# Altium PCB PCB1.PcbDoc (part 6 of 6)
Units mm, origin at the board's own origin, x right, y up, seen from the top; angles counter-clockwise.
Board outline 1473.2 x 504.06 mm, 4 copper layers (Top Layer, MidLayer1, MidLayer2, Bottom Layer); 162 components, 222 nets, 4894 pads, 2213 vias.
Unrouted connection lines stored in the file: 216.
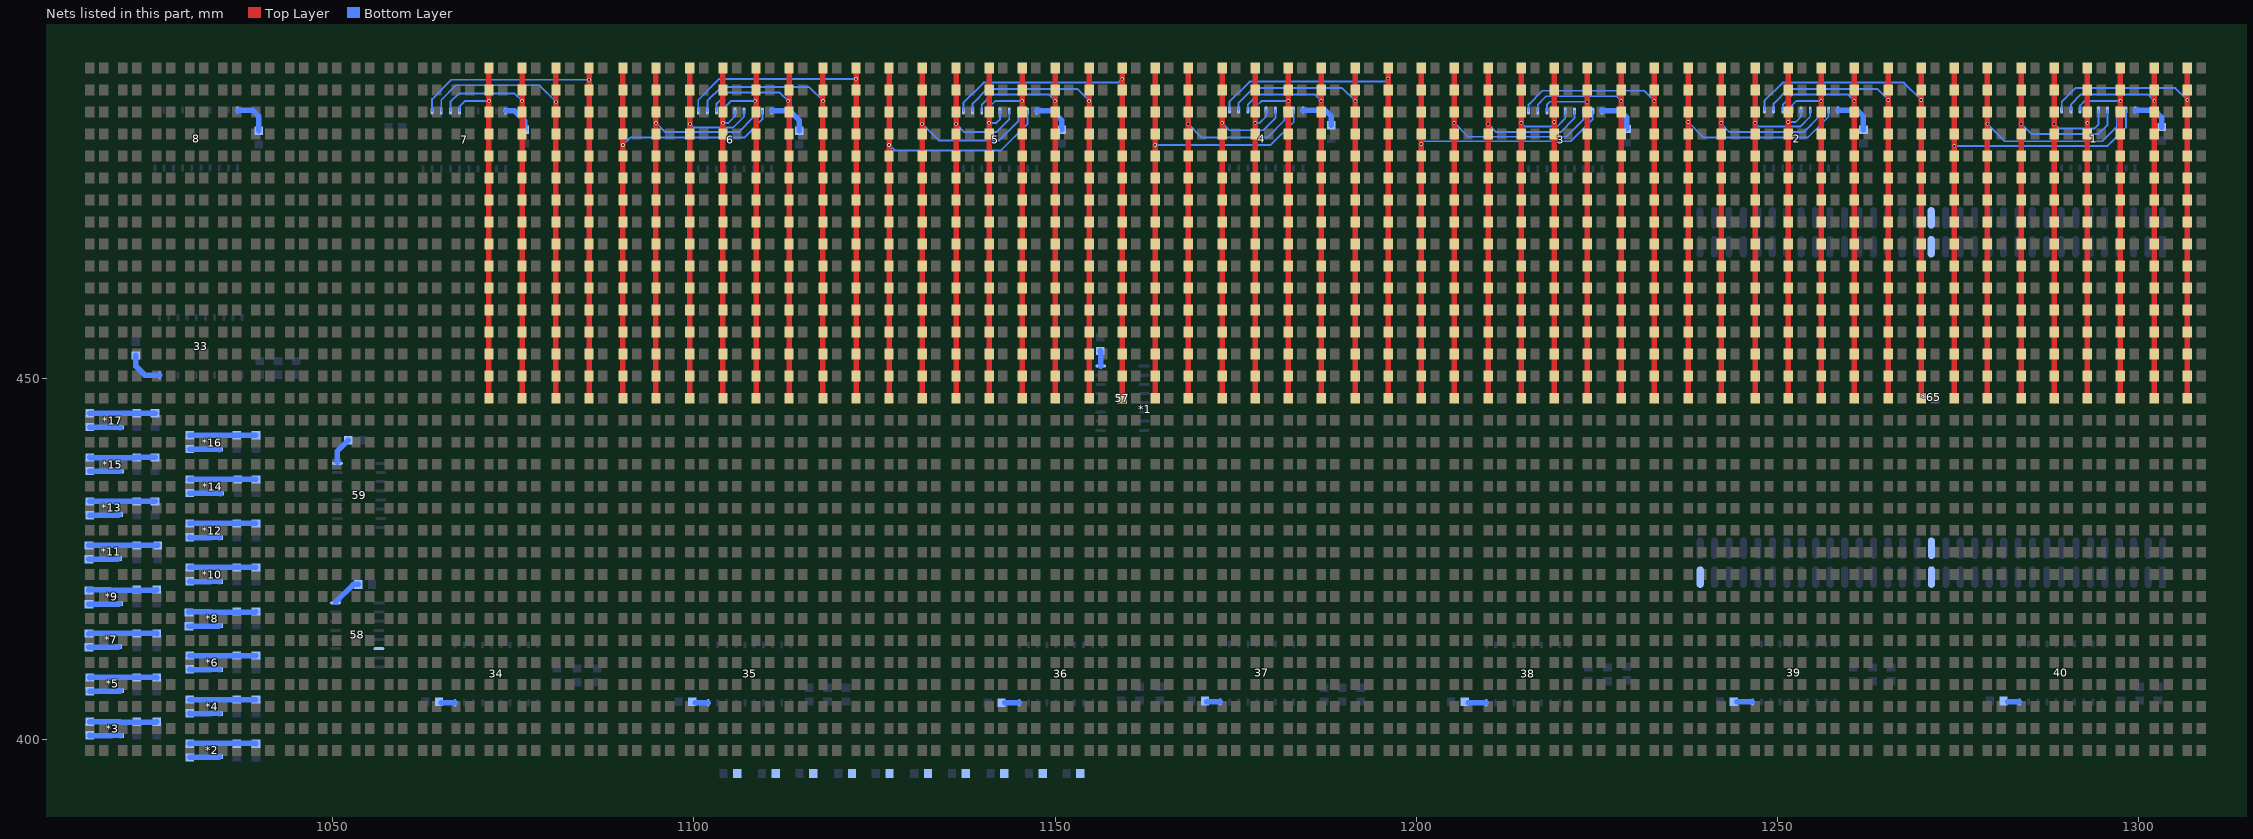
[diagram p8: the nets of this part, all layers, seen from the top]

## Via types
v1: diameter 0.508, hole 0.305, Top Layer to MidLayer1, 2032 vias
v2: diameter 0.508, hole 0.305, Top Layer to Bottom Layer, 143 vias
v3: diameter 0.508, hole 0.305, MidLayer2 to Bottom Layer, 38 vias

## Nets (pads, with @x,y where several pads share a name; then routed paths per layer and width w, separated by ;. In a path a pad name is that pad's centre, name@x,y a point inside that pad or via, vN(x,y) a via of type N, cw(c..) or ccw(c..) an arc to the next point about the centre after c; other vN are vias at no path point) (continued)
Net*1_93: 7.15 *1.93 | length 50.7
  Top Layer w0.762: *1.93@1071.626,447.167 *1.93@1071.626,486.918 *1.93@1071.626,492.887
  Bottom Layer w0.254: 7.15@1067.562,487.044 1067.562,487.68 1068.324,488.442 v2(1071.626,488.442)
Net*1_94: 7.14 *1.94 | length 57.8
  Top Layer w0.762: *1.94@1076.198,447.167 *1.94@1076.198,486.918 *1.94@1076.198,489.966 *1.94@1076.198,492.887
  Bottom Layer w0.254: 7.14@1066.292,487.044 1066.292,488.315 1067.435,489.458 1075.182,489.458 v2(1076.198,488.442)
Net*1_95: 7.13 *1.95 | length 64.9
  Top Layer w0.762: *1.95@1080.897,447.167 *1.95@1080.897,486.918 *1.95@1080.897,489.966 *1.95@1080.897,492.887
  Bottom Layer w0.254: 7.13@1065.022,487.044 1065.022,488.569 1067.054,490.601 1078.611,490.601 v2(1080.897,488.315)
Net*1_96: 7.12 *1.96 | length 70.2
  Top Layer w0.762: *1.96@1085.469,447.167 *1.96@1085.469,489.966 *1.96@1085.469,492.887
  Bottom Layer w0.254: 7.12@1063.752,487.044 1063.752,488.696 1066.419,491.363 v2(1085.469,491.363)
Net*1_97: 6.19 *1.97 | length 67.6
  Top Layer w0.762: *1.97@1090.168,447.421 1090.168,462.661 *1.97@1090.168,483.87 *1.97@1090.168,493.141
  Bottom Layer w0.254: v2(1090.168,482.346) 1091.184,483.362 1106.932,483.362 1109.472,485.902 6.19@1109.472,487.044
Net*1_98: 6.18 *1.98 | length 61.4
  Top Layer w0.762: *1.98@1094.74,447.421 1094.74,462.661 *1.98@1094.74,483.87 *1.98@1094.74,486.918 *1.98@1094.74,493.141
  Bottom Layer w0.254: v2(1094.74,485.394) 1096.01,484.124 1106.175,484.124 1108.202,486.151 6.18@1108.202,487.044
Net*1_99: 6.17 *1.99 | length 54.8
  Top Layer w0.762: *1.99@1099.439,447.421 *1.99@1099.439,486.918 *1.99@1099.439,493.141
  Bottom Layer w0.254: v2(1099.439,485.267) 1099.947,484.759 1105.408,484.759 1106.932,486.283 6.17@1106.932,487.044
Net*1_100: 6.16 *1.100 | length 48.5
  Top Layer w0.762: *1.100@1104.011,447.421 1104.011,468.757 *1.100@1104.011,486.918 *1.100@1104.011,493.141
  Bottom Layer w0.254: v2(1104.011,485.394) 1104.773,485.394 1105.662,486.283 6.16@1105.662,487.044
Net*1_101: 6.15 *1.101 | length 50.7
  Top Layer w0.762: *1.101@1108.583,447.421 *1.101@1108.583,489.966 *1.101@1108.583,493.141
  Bottom Layer w0.254: 6.15@1104.392,487.044 1104.392,487.68 1105.154,488.442 v2(1108.456,488.442)
Net*1_102: 6.14 *1.102 | length 57.7
  Top Layer w0.762: *1.102@1113.155,447.421 1113.155,474.853 *1.102@1113.155,489.966 *1.102@1113.155,493.014 *1.102@1113.155,493.141
  Bottom Layer w0.254: 6.14@1103.122,487.044 1103.122,488.061 1104.646,489.585 1111.885,489.585 v2(1113.028,488.442)
Net*1_103: 6.13 *1.103 | length 64.7
  Top Layer w0.762: *1.103@1117.854,447.421 1117.854,474.853 *1.103@1117.854,489.966 *1.103@1117.854,493.014 *1.103@1117.854,493.141
  Bottom Layer w0.254: 6.13@1101.852,487.044 1101.852,488.442 1103.757,490.347 1115.949,490.347 v2(1117.854,488.442)
Net*1_104: 6.12 *1.104 | length 70.3
  Top Layer w0.762: *1.104@1122.426,447.421 *1.104@1122.426,450.342 *1.104@1122.426,453.39 *1.104@1122.426,456.438 *1.104@1122.426,459.486 *1.104@1122.426,462.534 *1.104@1122.426,465.582 *1.104@1122.426,468.63 *1.104@1122.426,471.678 *1.104@1122.426,474.726 *1.104@1122.426,477.774 *1.104@1122.426,480.822 *1.104@1122.426,483.87 *1.104@1122.426,486.918 *1.104@1122.426,489.966 *1.104@1122.426,493.014 *1.104@1122.426,493.141
  Bottom Layer w0.254: 6.12@1100.582,487.044 1100.582,488.569 1103.503,491.49 v2(1122.426,491.49)
Net*1_105: 5.19 *1.105 | length 68.5
  Top Layer w0.762: *1.105@1126.998,447.294 *1.105@1126.998,450.342 *1.105@1126.998,453.39 *1.105@1126.998,456.438 *1.105@1126.998,459.486 *1.105@1126.998,462.534 *1.105@1126.998,465.582 *1.105@1126.998,468.63 *1.105@1126.998,471.678 *1.105@1126.998,474.726 *1.105@1126.998,477.774 *1.105@1126.998,480.822 *1.105@1126.998,483.87 *1.105@1126.998,486.918 *1.105@1126.998,489.966 *1.105@1126.998,493.014
  Bottom Layer w0.254: v2(1126.998,482.346) 1127.76,481.584 1142.492,481.584 1146.175,485.267 5.19@1146.175,487.044
Net*1_106: 5.18 *1.106 | length 62.5
  Top Layer w0.762: *1.106@1131.57,447.294 *1.106@1131.57,450.342 *1.106@1131.57,453.39 *1.106@1131.57,456.438 *1.106@1131.57,459.486 *1.106@1131.57,462.534 *1.106@1131.57,465.582 *1.106@1131.57,468.63 *1.106@1131.57,471.678 *1.106@1131.57,474.726 *1.106@1131.57,477.774 *1.106@1131.57,480.822 *1.106@1131.57,483.87 *1.106@1131.57,486.918 *1.106@1131.57,489.966 *1.106@1131.57,493.014
  Bottom Layer w0.254: v2(1131.57,485.267) 1133.856,482.981 1142.238,482.981 1144.905,485.648 5.18@1144.905,487.044
Net*1_107: 5.17 *1.107 | length 55.4
  Top Layer w0.762: *1.107@1136.269,447.294 *1.107@1136.269,450.342 *1.107@1136.269,453.39 *1.107@1136.269,456.438 *1.107@1136.269,459.486 *1.107@1136.269,462.534 *1.107@1136.269,465.582 *1.107@1136.269,468.63 *1.107@1136.269,471.678 *1.107@1136.269,474.726 *1.107@1136.269,477.774 *1.107@1136.269,480.822 *1.107@1136.269,483.87 *1.107@1136.269,486.918 *1.107@1136.269,489.966 *1.107@1136.269,493.014
  Bottom Layer w0.254: v2(1136.269,485.267) 1137.412,484.124 1141.857,484.124 1143.635,485.902 5.17@1143.635,487.044
Net*1_108: 5.16 *1.108 | length 48.6
  Top Layer w0.762: *1.108@1140.841,447.294 *1.108@1140.841,450.342 *1.108@1140.841,453.39 *1.108@1140.841,456.438 *1.108@1140.841,459.486 *1.108@1140.841,462.534 *1.108@1140.841,465.582 *1.108@1140.841,468.63 *1.108@1140.841,471.678 *1.108@1140.841,474.726 *1.108@1140.841,477.774 *1.108@1140.841,480.822 *1.108@1140.841,483.87 *1.108@1140.841,486.918 *1.108@1140.841,489.966 *1.108@1140.841,493.014
  Bottom Layer w0.254: v2(1140.841,485.394) 1141.857,485.394 1142.365,485.902 5.16@1142.365,487.044
Net*1_109: 5.15 *1.109 | length 51.1
  Top Layer w0.762: *1.109@1145.413,447.294 *1.109@1145.413,450.342 *1.109@1145.413,453.39 *1.109@1145.413,456.438 *1.109@1145.413,459.486 *1.109@1145.413,462.534 *1.109@1145.413,465.582 *1.109@1145.413,468.63 *1.109@1145.413,471.678 *1.109@1145.413,474.726 *1.109@1145.413,477.774 *1.109@1145.413,480.822 *1.109@1145.413,483.87 *1.109@1145.413,486.918 *1.109@1145.413,489.966 *1.109@1145.413,493.014
  Bottom Layer w0.254: 5.15@1141.095,487.044 1141.095,487.807 1141.73,488.442 v2(1145.413,488.442)
Net*1_110: 5.14 *1.110 | length 57.7
  Top Layer w0.762: *1.110@1149.985,447.294 *1.110@1149.985,450.342 *1.110@1149.985,453.39 *1.110@1149.985,456.438 *1.110@1149.985,459.486 *1.110@1149.985,462.534 *1.110@1149.985,465.582 *1.110@1149.985,468.63 *1.110@1149.985,471.678 *1.110@1149.985,474.726 *1.110@1149.985,477.774 *1.110@1149.985,480.822 *1.110@1149.985,483.87 *1.110@1149.985,486.918 *1.110@1149.985,489.966 *1.110@1149.985,493.014
  Bottom Layer w0.254: 5.14@1139.825,487.044 1139.825,487.934 1141.222,489.331 1149.096,489.331 v2(1149.985,488.442)
Net*1_111: 5.13 *1.111 | length 64.4
  Top Layer w0.762: *1.111@1154.684,447.294 *1.111@1154.684,450.342 *1.111@1154.684,453.39 *1.111@1154.684,456.438 *1.111@1154.684,459.486 *1.111@1154.684,462.534 *1.111@1154.684,465.582 *1.111@1154.684,468.63 *1.111@1154.684,471.678 *1.111@1154.684,474.726 *1.111@1154.684,477.774 *1.111@1154.684,480.822 *1.111@1154.684,483.87 *1.111@1154.684,486.918 *1.111@1154.684,489.966 *1.111@1154.684,493.014
  Bottom Layer w0.254: 5.13@1138.555,487.044 1138.555,488.061 1140.587,490.093 1153.033,490.093 v2(1154.684,488.442)
Net*1_112: 5.12 *1.112 | length 70.2
  Top Layer w0.762: *1.112@1159.256,447.294 *1.112@1159.256,450.342 *1.112@1159.256,453.39 *1.112@1159.256,456.438 *1.112@1159.256,459.486 *1.112@1159.256,462.534 *1.112@1159.256,465.582 *1.112@1159.256,468.63 *1.112@1159.256,471.678 *1.112@1159.256,474.726 *1.112@1159.256,477.774 *1.112@1159.256,480.822 *1.112@1159.256,483.87 *1.112@1159.256,486.918 *1.112@1159.256,489.966 *1.112@1159.256,493.014
  Bottom Layer w0.254: 5.12@1137.285,487.044 1137.285,488.188 1140.079,490.982 1158.748,490.982 v2(1159.256,491.49)
Net*1_113: 4.19 *1.113 | length 67.9
  Top Layer w0.762: *1.113@1163.828,447.294 *1.113@1163.828,450.342 *1.113@1163.828,453.39 *1.113@1163.828,456.438 *1.113@1163.828,459.486 *1.113@1163.828,462.534 *1.113@1163.828,465.582 *1.113@1163.828,468.63 *1.113@1163.828,471.678 *1.113@1163.828,474.726 *1.113@1163.828,477.774 *1.113@1163.828,480.822 *1.113@1163.828,483.87 *1.113@1163.828,486.918 *1.113@1163.828,489.966 *1.113@1163.828,493.014
  Bottom Layer w0.254: v2(1163.828,482.346) 1179.83,482.346 1183.005,485.521 4.19@1183.005,487.171
Net*1_114: 4.18 *1.114 | length 62.2
  Top Layer w0.762: *1.114@1168.4,447.294 *1.114@1168.4,450.342 *1.114@1168.4,453.39 *1.114@1168.4,456.438 *1.114@1168.4,459.486 *1.114@1168.4,462.534 *1.114@1168.4,465.582 *1.114@1168.4,468.63 *1.114@1168.4,471.678 *1.114@1168.4,474.726 *1.114@1168.4,477.774 *1.114@1168.4,480.822 *1.114@1168.4,483.87 *1.114@1168.4,486.918 *1.114@1168.4,489.966 *1.114@1168.4,493.014
  Bottom Layer w0.254: v2(1168.4,485.267) 1170.305,483.362 1179.322,483.362 1181.735,485.775 4.18@1181.735,487.171
Net*1_115: 4.17 *1.115 | length 55.3
  Top Layer w0.762: *1.115@1173.099,447.294 *1.115@1173.099,450.342 *1.115@1173.099,453.39 *1.115@1173.099,456.438 *1.115@1173.099,459.486 *1.115@1173.099,462.534 *1.115@1173.099,465.582 *1.115@1173.099,468.63 *1.115@1173.099,471.678 *1.115@1173.099,474.726 *1.115@1173.099,477.774 *1.115@1173.099,480.822 *1.115@1173.099,483.87 *1.115@1173.099,486.918 *1.115@1173.099,489.966 *1.115@1173.099,493.014
  Bottom Layer w0.254: v2(1173.099,485.394) 1174.115,484.378 1178.814,484.378 1180.465,486.029 4.17@1180.465,487.171
Net*1_116: 4.16 *1.116 | length 48.5
  Top Layer w0.762: *1.116@1177.671,447.294 *1.116@1177.671,450.342 *1.116@1177.671,453.39 *1.116@1177.671,456.438 *1.116@1177.671,459.486 *1.116@1177.671,462.534 *1.116@1177.671,465.582 *1.116@1177.671,468.63 *1.116@1177.671,471.678 *1.116@1177.671,474.726 *1.116@1177.671,477.774 *1.116@1177.671,480.822 *1.116@1177.671,483.87 *1.116@1177.671,486.918 *1.116@1177.671,489.966 *1.116@1177.671,493.014
  Bottom Layer w0.254: v2(1177.671,485.394) 1178.306,485.394 1179.195,486.283 4.16@1179.195,487.171
Net*1_117: 4.15 *1.117 | length 50.9
  Top Layer w0.762: *1.117@1182.243,447.294 *1.117@1182.243,450.342 *1.117@1182.243,453.39 *1.117@1182.243,456.438 *1.117@1182.243,459.486 *1.117@1182.243,462.534 *1.117@1182.243,465.582 *1.117@1182.243,468.63 *1.117@1182.243,471.678 *1.117@1182.243,474.726 *1.117@1182.243,477.774 *1.117@1182.243,480.822 *1.117@1182.243,483.87 *1.117@1182.243,486.918 *1.117@1182.243,489.966 *1.117@1182.243,493.014
  Bottom Layer w0.254: 4.15@1177.925,487.171 1177.925,487.807 1178.56,488.442 v2(1182.243,488.442)
Net*1_118: 4.14 *1.118 | length 57.6
  Top Layer w0.762: *1.118@1186.815,447.294 *1.118@1186.815,450.342 *1.118@1186.815,453.39 *1.118@1186.815,456.438 *1.118@1186.815,459.486 *1.118@1186.815,462.534 *1.118@1186.815,465.582 *1.118@1186.815,468.63 *1.118@1186.815,471.678 *1.118@1186.815,474.726 *1.118@1186.815,477.774 *1.118@1186.815,480.822 *1.118@1186.815,483.87 *1.118@1186.815,486.918 *1.118@1186.815,489.966 *1.118@1186.815,493.014
  Bottom Layer w0.254: 4.14@1176.655,487.171 1176.655,487.934 1178.052,489.331 1185.926,489.331 v2(1186.815,488.442)
Net*1_119: 4.13 *1.119 | length 64.4
  Top Layer w0.762: *1.119@1191.514,447.294 *1.119@1191.514,450.342 *1.119@1191.514,453.39 *1.119@1191.514,456.438 *1.119@1191.514,459.486 *1.119@1191.514,462.534 *1.119@1191.514,465.582 *1.119@1191.514,468.63 *1.119@1191.514,471.678 *1.119@1191.514,474.726 *1.119@1191.514,477.774 *1.119@1191.514,480.822 *1.119@1191.514,483.87 *1.119@1191.514,486.918 *1.119@1191.514,489.966 *1.119@1191.514,493.014
  Bottom Layer w0.254: 4.13@1175.385,487.171 1175.385,488.188 1177.417,490.22 1189.736,490.22 v2(1191.514,488.442)
Net*1_120: 4.12 *1.120 | length 70.3
  Top Layer w0.762: *1.120@1196.086,447.294 *1.120@1196.086,450.342 *1.120@1196.086,453.39 *1.120@1196.086,456.438 *1.120@1196.086,459.486 *1.120@1196.086,462.534 *1.120@1196.086,465.582 *1.120@1196.086,468.63 *1.120@1196.086,471.678 *1.120@1196.086,474.726 *1.120@1196.086,477.774 *1.120@1196.086,480.822 *1.120@1196.086,483.87 *1.120@1196.086,486.918 *1.120@1196.086,489.966 *1.120@1196.086,493.014
  Bottom Layer w0.254: 4.12@1174.115,487.171 1174.115,488.315 1176.909,491.109 1195.832,491.109 1196.086,491.363 v2(1196.086,491.553)
Net*1_121: 3.19 *1.121 | length 72
  Top Layer w0.762: *1.121@1200.658,447.167 1200.658,462.407 *1.121@1200.658,492.887
  Bottom Layer w0.254: v2(1200.658,482.473) 1201.039,482.854 1205.738,482.854 1221.359,482.854 1224.407,485.902 3.19@1224.407,487.044
Net*1_122: 3.18 *1.122 | length 66.6
  Top Layer w0.762: *1.122@1205.23,447.167 *1.122@1205.23,480.822 *1.122@1205.23,483.87 *1.122@1205.23,492.887
  Bottom Layer w0.254: v2(1205.23,485.394) 1207.135,483.489 1220.724,483.489 1223.137,485.902 3.18@1223.137,487.044
Net*1_123: 3.17 *1.123 | length 59.9
  Top Layer w0.762: *1.123@1209.929,447.167 1209.929,462.407 *1.123@1209.929,480.822 *1.123@1209.929,483.87 *1.123@1209.929,492.887
  Bottom Layer w0.254: v2(1209.929,485.267) 1211.072,484.124 1219.962,484.124 1221.867,486.029 3.17@1221.867,487.044
Net*1_124: 3.16 *1.124 | length 53.5
  Top Layer w0.762: *1.124@1214.501,447.167 1214.501,462.407 *1.124@1214.501,483.87 *1.124@1214.501,492.887
  Bottom Layer w0.254: v2(1214.501,485.394) 1215.009,484.886 1219.454,484.886 1220.597,486.029 3.16@1220.597,487.044
Net*1_125: 3.15 *1.125 | length 47.3
  Top Layer w0.762: *1.125@1219.073,447.167 1219.073,483.743 *1.125@1219.073,483.87 *1.125@1219.073,486.918 *1.125@1219.073,492.887
  Bottom Layer w0.254: v2(1219.073,485.521) 1219.327,485.775 3.15@1219.327,487.044
Net*1_126: 3.14 *1.126 | length 52.4
  Top Layer w0.762: *1.126@1223.645,447.167 *1.126@1223.645,486.918 *1.126@1223.645,492.887
  Bottom Layer w0.254: 3.14@1218.057,487.044 1218.057,487.934 1218.438,488.315 v2(1223.645,488.315)
Net*1_127: 3.13 *1.127 | length 58.9
  Top Layer w0.762: *1.127@1228.344,447.167 *1.127@1228.344,486.918 *1.127@1228.344,492.887
  Bottom Layer w0.254: 3.13@1216.787,487.044 1216.787,487.934 1217.93,489.077 1227.709,489.077 v2(1228.344,488.442)
Net*1_128: 3.12 *1.128 | length 65.4
  Top Layer w0.762: *1.128@1232.916,447.167 *1.128@1232.916,486.918 *1.128@1232.916,489.966 *1.128@1232.916,492.887
  Bottom Layer w0.254: 3.12@1215.517,487.044 1215.517,487.934 1217.422,489.839 1231.519,489.839 v2(1232.916,488.442)
Net*1_129: 2.19 *1.129 | length 68.1
  Top Layer w0.762: *1.129@1237.615,447.421 *1.129@1237.615,483.87 *1.129@1237.615,486.918 *1.129@1237.615,493.141
  Bottom Layer w0.254: v2(1237.615,485.521) 1239.774,483.362 1254.125,483.362 1257.046,486.283 2.19@1257.046,487.171
Net*1_130: 2.18 *1.130 | length 61.6
  Top Layer w0.762: *1.130@1242.187,447.421 1242.187,462.661 *1.130@1242.187,483.87 *1.130@1242.187,486.918 *1.130@1242.187,493.141
  Bottom Layer w0.254: v2@1242.187,485.267 1243.33,484.124 1253.617,484.124 1255.776,486.283 2.18@1255.776,487.171
  other v2: 1242.187,485.394
Net*1_131: 2.17 *1.131 | length 55
  Top Layer w0.762: *1.131@1246.886,447.421 *1.131@1246.886,486.918 *1.131@1246.886,493.141
  Bottom Layer w0.254: v2(1246.886,485.394) 1247.394,484.886 1253.109,484.886 1254.506,486.283 2.17@1254.506,487.171
Net*1_132: 2.16 *1.132 | length 48.6
  Top Layer w0.762: *1.132@1251.458,447.421 1251.458,468.757 *1.132@1251.458,486.918 *1.132@1251.458,493.141
  Bottom Layer w0.254: v2@1251.585,485.521 1252.474,485.521 1253.236,486.283 2.16@1253.236,487.171
  other v2: 1251.458,485.521
Net*1_133: 2.15 *1.133 | length 50.7
  Top Layer w0.762: *1.133@1256.03,447.421 *1.133@1256.03,489.966 *1.133@1256.03,493.141
  Bottom Layer w0.254: 2.15@1251.966,487.171 1251.966,487.807 1252.601,488.442 v2(1256.03,488.442)
Net*1_134: 2.14 *1.134 | length 57.3
  Top Layer w0.762: *1.134@1260.602,447.421 *1.134@1260.602,489.966 *1.134@1260.602,493.141
  Bottom Layer w0.254: 2.14@1250.696,487.171 1250.696,487.934 1252.093,489.331 1259.713,489.331 v2(1260.602,488.442)
Net*1_135: 2.13 *1.135 | length 64
  Top Layer w0.762: *1.135@1265.301,447.421 1265.301,474.853 *1.135@1265.301,489.966 *1.135@1265.301,493.014 *1.135@1265.301,493.141
  Bottom Layer w0.254: 2.13@1249.426,487.171 1249.426,488.061 1251.458,490.093 1263.777,490.093 v2(1265.301,488.569)
Net*1_136: 2.12 *1.136 | length 70.8
  Top Layer w0.762: *1.136@1269.873,447.421 1269.873,474.853 *1.136@1269.873,489.966 *1.136@1269.873,493.014 *1.136@1269.873,493.141
  Bottom Layer w0.254: 2.12@1248.156,487.171 1248.156,488.442 1250.696,490.982 1267.46,490.982 v2(1269.873,488.569)
Net*1_137: 1.19 *1.137 | length 72.9
  Top Layer w0.762: *1.137@1274.445,447.294 *1.137@1274.445,450.342 *1.137@1274.445,453.39 *1.137@1274.445,456.438 *1.137@1274.445,459.486 *1.137@1274.445,462.534 *1.137@1274.445,465.582 *1.137@1274.445,468.63 *1.137@1274.445,471.678 *1.137@1274.445,474.726 *1.137@1274.445,477.774 *1.137@1274.445,480.822 *1.137@1274.445,483.87 *1.137@1274.445,486.918 *1.137@1274.445,489.966 *1.137@1274.445,493.014
  Bottom Layer w0.254: v2(1274.445,482.219) 1295.654,482.219 1298.194,484.759 1.19@1298.194,487.171
Net*1_138: 1.18 *1.138 | length 67.8
  Top Layer w0.762: *1.138@1279.017,447.294 *1.138@1279.017,450.342 *1.138@1279.017,453.39 *1.138@1279.017,456.438 *1.138@1279.017,459.486 *1.138@1279.017,462.534 *1.138@1279.017,465.582 *1.138@1279.017,468.63 *1.138@1279.017,471.678 *1.138@1279.017,474.726 *1.138@1279.017,477.774 *1.138@1279.017,480.822 *1.138@1279.017,483.87 *1.138@1279.017,486.918 *1.138@1279.017,489.966 *1.138@1279.017,493.014
  Bottom Layer w0.254: v2(1279.017,485.267) 1281.43,482.854 1294.892,482.854 1296.924,484.886 1.18@1296.924,487.171
Net*1_139: 1.17 *1.139 | length 60.8
  Top Layer w0.762: *1.139@1283.716,447.294 *1.139@1283.716,450.342 *1.139@1283.716,453.39 *1.139@1283.716,456.438 *1.139@1283.716,459.486 *1.139@1283.716,462.534 *1.139@1283.716,465.582 *1.139@1283.716,468.63 *1.139@1283.716,471.678 *1.139@1283.716,474.726 *1.139@1283.716,477.774 *1.139@1283.716,480.822 *1.139@1283.716,483.87 *1.139@1283.716,486.918 *1.139@1283.716,489.966 *1.139@1283.716,493.014
  Bottom Layer w0.254: v2(1283.716,485.267) 1285.113,483.87 1294.384,483.87 1295.654,485.14 1.17@1295.654,487.171
Net*1_140: 1.16 *1.140 | length 54.3
  Top Layer w0.762: *1.140@1288.288,447.294 *1.140@1288.288,450.342 *1.140@1288.288,453.39 *1.140@1288.288,456.438 *1.140@1288.288,459.486 *1.140@1288.288,462.534 *1.140@1288.288,465.582 *1.140@1288.288,468.63 *1.140@1288.288,471.678 *1.140@1288.288,474.726 *1.140@1288.288,477.774 *1.140@1288.288,480.822 *1.140@1288.288,483.87 *1.140@1288.288,486.918 *1.140@1288.288,489.966 *1.140@1288.288,493.014
  Bottom Layer w0.254: v2(1288.288,485.267) 1288.923,484.632 1293.876,484.632 1294.384,485.14 1.16@1294.384,487.171
Net*1_141: 1.15 *1.141 | length 47.6
  Top Layer w0.762: *1.141@1292.86,447.294 *1.141@1292.86,450.342 *1.141@1292.86,453.39 *1.141@1292.86,456.438 *1.141@1292.86,459.486 *1.141@1292.86,462.534 *1.141@1292.86,465.582 *1.141@1292.86,468.63 *1.141@1292.86,471.678 *1.141@1292.86,474.726 *1.141@1292.86,477.774 *1.141@1292.86,480.822 *1.141@1292.86,483.87 *1.141@1292.86,486.918 *1.141@1292.86,489.966 *1.141@1292.86,493.014
  Bottom Layer w0.254: v2(1292.86,485.394) 1293.114,485.648 1.15@1293.114,487.171
Net*1_142: 1.14 *1.142 | length 52.2
  Top Layer w0.762: *1.142@1297.432,447.294 *1.142@1297.432,450.342 *1.142@1297.432,453.39 *1.142@1297.432,456.438 *1.142@1297.432,459.486 *1.142@1297.432,462.534 *1.142@1297.432,465.582 *1.142@1297.432,468.63 *1.142@1297.432,471.678 *1.142@1297.432,474.726 *1.142@1297.432,477.774 *1.142@1297.432,480.822 *1.142@1297.432,483.87 *1.142@1297.432,486.918 *1.142@1297.432,489.966 *1.142@1297.432,493.014
  Bottom Layer w0.254: 1.14@1291.844,487.171 1291.844,487.807 1292.479,488.442 v2(1297.432,488.442)
Net*1_143: 1.13 *1.143 | length 59
  Top Layer w0.762: *1.143@1302.131,447.294 *1.143@1302.131,450.342 *1.143@1302.131,453.39 *1.143@1302.131,456.438 *1.143@1302.131,459.486 *1.143@1302.131,462.534 *1.143@1302.131,465.582 *1.143@1302.131,468.63 *1.143@1302.131,471.678 *1.143@1302.131,474.726 *1.143@1302.131,477.774 *1.143@1302.131,480.822 *1.143@1302.131,483.87 *1.143@1302.131,486.918 *1.143@1302.131,489.966 *1.143@1302.131,493.014
  Bottom Layer w0.254: 1.13@1290.574,487.171 1290.574,487.934 1291.971,489.331 1301.242,489.331 v2(1302.131,488.442)
Net*1_144: 1.12 *1.144 | length 65.7
  Top Layer w0.762: *1.144@1306.703,447.294 *1.144@1306.703,450.342 *1.144@1306.703,453.39 *1.144@1306.703,456.438 *1.144@1306.703,459.486 *1.144@1306.703,462.534 *1.144@1306.703,465.582 *1.144@1306.703,468.63 *1.144@1306.703,471.678 *1.144@1306.703,474.726 *1.144@1306.703,477.774 *1.144@1306.703,480.822 *1.144@1306.703,483.87 *1.144@1306.703,486.918 *1.144@1306.703,489.966 *1.144@1306.703,493.014
  Bottom Layer w0.254: 1.12@1289.304,487.171 1289.304,488.315 1291.209,490.22 1305.052,490.22 v2(1306.703,488.569)
Net*2_2: 9.1 13.1 17.2 *2.2 | length 9.2
  Bottom Layer w0.762: 9.1@1030.224,399.476 1030.224,399.527 1039.317,399.527 13.1@1039.368,399.476
Net*3_2: 10.1 14.1 18.2 *3.2 | length 9.3
  Bottom Layer w0.762: 10.1@1016.381,402.524 1020.511,402.524 *3.2@1020.572,402.463 1025.591,402.463 14.1@1025.652,402.524
Net*4_2: 11.1 15.1 19.2 *4.2 | length 9.1
  Bottom Layer w0.762: 11.1@1030.224,405.572 15.1@1039.368,405.572
Net*5_2: 12.1 16.1 20.2 *5.2 | length 9.3
  Bottom Layer w0.762: 12.1@1016.381,408.62 1016.381,408.671 1025.601,408.671 16.1@1025.652,408.62
Net*6_2: 21.1 25.1 29.2 *6.2 | length 9.1
  Bottom Layer w0.762: 21.1@1030.224,411.668 25.1@1039.368,411.668
Net*7_2: 22.1 26.1 30.2 *7.2 | length 9.5
  Bottom Layer w0.762: 22.1@1016.254,414.716 1016.305,414.767 1025.652,414.767 30.2@1025.652,414.716
Net*8_2: 23.1 27.1 31.2 *8.2 | length 9.4
  Bottom Layer w0.762: 23.1@1030.097,417.637 1030.097,417.703 1033.036,417.703 1033.102,417.637 1039.241,417.637 27.1@1039.368,417.764
Net*9_2: 24.1 28.1 32.2 *9.2 | length 9.5
  Bottom Layer w0.762: 24.1@1016.254,420.685 1016.254,420.751 1019.193,420.751 1019.259,420.685 1025.525,420.685 28.1@1025.652,420.812
Net*10_2: 41.1 45.1 49.2 *10.2 | length 9.1
  Bottom Layer w0.762: 41.1@1030.224,423.86 45.1@1039.368,423.86
Net*11_2: 42.1 46.1 50.2 *11.2 | length 9.6
  Bottom Layer w0.762: 42.1@1016.254,426.908 1016.254,426.959 1025.728,426.959 46.1@1025.779,426.908
Net*12_2: 43.1 47.1 51.2 *12.2 | length 9.1
  Bottom Layer w0.762: 43.1@1030.224,429.956 47.1@1039.368,429.956
Net*13_2: 44.1 48.1 52.2 *13.2 | length 9.1
  Bottom Layer w0.762: 44.1@1016.381,433.004 1016.381,433.055 1019.208,433.055 1019.259,433.004 48.1@1022.853,433.004 52.2@1025.398,433.004
Net*14_2: 53.1 60.1 64.2 *14.2 | length 9.1
  Bottom Layer w0.762: 53.1@1030.224,436.052 60.1@1036.828,436.052 64.2@1039.368,436.052
Net*15_2: 54.1 61.1 65.2 *15.2 | length 9.1
  Bottom Layer w0.762: 54.1@1016.381,439.1 1016.442,439.039 1022.802,439.039 61.1@1022.863,439.1 65.2@1025.398,439.1
Net*16_2: 55.1 62.1 66.2 *16.2 | length 9.1
  Bottom Layer w0.762: 55.1@1030.224,442.148 62.1@1036.701,442.148 66.2@1039.368,442.148
Net*17_2: 56.1 63.1 67.2 *17.2 | length 9
  Bottom Layer w0.762: 56.1@1016.381,445.196 63.1@1022.863,445.196 67.2@1025.398,445.196
VCC: 1.20 2.20 3.20 4.20 5.20 6.20 7.20 8.20 9.2 10.2 11.2 12.2 21.2 22.2 23.2 24.2 33.20 34.20 35.20 36.20 37.20 38.20 39.20 40.20 41.2 42.2 43.2 44.2 53.2 54.2 55.2 56.2 57.16 58.6 58.16 59.16 68.1 69.1 70.1 71.1 72.1 73.1 74.1 75.1 76.1 77.1 78.1 79.1 80.1 81.1 82.1 83.1 84.1 85.1 86.1 87.1 88.1 89.1 90.1 91.1 92.1 93.1 94.1 95.1 96.1 *2.3 *3.3 *4.3 *5.3 *6.3 *7.3 *8.3 *9.3 *10.3 *11.3 *12.3 *13.3 *14.3 *15.3 *16.3 *17.3 *65.17 *65.33 *65.50 *65.83 *65.116 | length 139
  Bottom Layer w0.762: 22.2@1016.254,412.816 1020.252,412.816 *7.3@1020.318,412.882 ; 24.2@1016.254,418.785 1020.379,418.785 *9.3@1020.445,418.851 ; 42.2@1016.254,425.008 1020.252,425.008 *11.3@1020.318,425.074 ; 10.2@1016.381,400.624 1016.381,400.578 1019.335,400.578 1019.381,400.624 1020.511,400.624 *3.3@1020.572,400.563 ; 12.2@1016.381,406.72 1020.506,406.72 *5.3@1020.572,406.786 ; 44.2@1016.381,431.104 1020.379,431.104 *13.3@1020.445,431.17 ; 54.2@1016.381,437.2 1016.381,437.154 1019.335,437.154 1019.381,437.2 *15.3@1020.511,437.2 ; 56.2@1016.381,443.296 1016.381,443.25 1019.335,443.25 1019.381,443.296 1020.511,443.296 *17.3@1020.572,443.235 ; 79.1@1022.731,453.202 1022.731,451.739 1024,450.47 33.20@1026.033,450.47 ; 23.2@1030.097,415.737 1034.222,415.737 *8.3@1034.288,415.803 ; 9.2@1030.224,397.576 1034.222,397.576 *2.3@1034.288,397.642 ; 11.2@1030.224,403.672 1030.224,403.626 1033.051,403.626 1033.097,403.672 1034.227,403.672 *4.3@1034.288,403.611 ; 21.2@1030.224,409.768 1030.224,409.722 1033.051,409.722 1033.097,409.768 1034.227,409.768 *6.3@1034.288,409.707 ; 41.2@1030.224,421.96 1030.224,421.914 1033.051,421.914 1033.097,421.96 1034.227,421.96 *10.3@1034.288,421.899 ; 43.2@1030.224,428.056 1030.224,428.01 1033.051,428.01 1033.097,428.056 1034.227,428.056 *12.3@1034.288,427.995 ; 53.2@1030.224,434.152 1030.224,434.106 1033.178,434.106 1033.224,434.152 1034.354,434.152 *14.3@1034.415,434.091 ; 55.2@1030.224,440.248 1030.224,440.202 1033.051,440.202 1033.097,440.248 1034.227,440.248 *16.3@1034.288,440.187 ; 8.20@1036.828,487.171 1038.861,487.171 1039.749,486.283 82.1@1039.749,484.312 ; 58.16@1050.386,419.056 1052.843,421.513 80.1@1053.531,421.513 ; 59.16@1050.64,438.404 1050.64,439.958 96.1@1052.134,441.452 ; 81.1@1065.022,405.131 34.20@1066.927,405.131 ; 7.20@1073.912,487.044 1075.183,487.044 1076.579,485.648 85.1@1076.579,484.439 ; 83.1@1100.201,405.131 35.20@1101.979,405.131 ; 6.20@1110.742,487.044 1113.283,487.044 1114.552,485.775 92.1@1114.552,484.312 ; 84.1@1142.999,405.131 36.20@1145.032,405.131 ; 5.20@1147.445,487.044 1149.605,487.044 1150.874,485.775 95.1@1150.874,484.439 ; 68.1@1156.208,453.837 1156.304,453.741 57.16@1156.304,451.739 ; 86.1@1170.939,405.258 37.20@1172.845,405.258 ; 4.20@1184.275,487.171 1187.324,487.171 1188.212,486.283 94.1@1188.212,485.074 ; 87.1@1207.134,405.131 38.20@1209.675,405.131 ; 3.20@1225.677,487.044 1228.218,487.044 1229.106,486.156 93.1@1229.106,484.566 ; 88.1@1244.346,405.257 1244.347,405.258 39.20@1246.505,405.258 ; 2.20@1258.316,487.171 1260.984,487.171 1261.872,486.283 91.1@1261.872,484.439 ; 1281.81,405.258 40.20@1283.462,405.258 ; 1.20@1299.464,487.171 1302.132,487.171 1303.147,486.156 90.1@1303.147,484.82
pads on no net: 1.1 2.1 3.1 4.1 5.1 6.1 7.1 8.1 33.1 34.1 35.1 36.1 37.1 38.1 39.1 40.1 57.1 57.2 57.3 57.4 57.5 57.6 *65.2 *65.3 *65.4 *65.5 *65.6 *65.7 *65.8 *65.9 *65.10 *65.11 *65.12 *65.13 *65.14 *65.15 *65.16 *65.19 *65.20 *65.21 *65.22 *65.23 *65.24 *65.25 *65.26 *65.27 *65.28 *65.29 *65.30 *65.31 *65.32 *65.35 *65.36 *65.37 *65.38 *65.39 *65.40 *65.41 *65.42 *65.43 *65.44 *65.45 *65.46 *65.47 *65.48 *65.51 *65.52 *65.53 *65.54 *65.55 *65.56 *65.57 *65.58 *65.59 *65.60 *65.61 *65.62 *65.63 *65.64 *65.65 *65.66 *65.67 *65.68 *65.69 *65.70 *65.71 *65.72 *65.73 *65.74 *65.75 *65.76 *65.77 *65.78 *65.79 *65.80 *65.81 *65.82 *65.85 *65.86 *65.87 *65.88 *65.89 *65.90 *65.91 *65.92 *65.93 *65.94 *65.95 *65.96 *65.97 *65.98 *65.100 *65.101 *65.102 *65.103 *65.104 *65.105 *65.106 *65.107 *65.108 *65.109 *65.110 *65.111 *65.112 *65.113 *65.114 *65.115 *65.117 *65.118 *65.119 *65.120 *65.121 *65.122 *65.123 *65.124 *65.125 *65.126 *65.127 *65.128 *65.129 *65.130 *65.131